# EAGLE board CT_schematic (EAGLE 7.6.0)

Size 100 x 80 mm. Coordinates in mm from the lower left corner, seen from the top.
Outline: 0,0 100,0 100,80 0,80 0,0
Copper layers (1*16): Top 0.035mm / dielectric 1.5mm / Bottom 0.035mm
Design rules "default": minimum track width 10mil, minimum drill 24mil, track to track 8mil, track to pad 8mil, pad to pad 8mil, via to via 8mil, smd to smd 8mil, copper to edge 40mil, drill to drill 8mil, minimum pad ring 10mil, minimum via ring 8mil, stop-mask expansion 4mil, vias tented up to drill 0mil, thermal gap 10mil

## Footprints (pad centres in the part's own frame; a part is rotated, then mirrored left to right if it is on the bottom)
C0603 = smd 0.8 x 0.8: 1 -0.762,0; 2 0.762,0
C0402 = smd 0.5 x 0.5: 1 -0.508,0; 2 0.508,0
C1210 = smd 1.2 x 2.5: 1 -1.524,0; 2 1.524,0
C0805 = smd 1.2 x 1.3: 1 -1.016,0; 2 1.016,0
EXV-9B = smd 2.718 x 1.778: 1 -2.108,0; 2 2.108,0
EXV-9H = smd 3.505 x 1.676: 1 -2.857,0; 2 2.857,0
PJ-037B_PACKAGE = drill 3.7 square: 1 12,0 | drill 3.2 square: 2 6,0
R0603 = smd 0.8 x 0.8: 1 -0.762,0; 2 0.762,0
UFQFPN48 = smd 0.559 x 0.305: 1 -3.375,2.751; 2 -3.375,2.251; 3 -3.375,1.75; 4 -3.375,1.25; 5 -3.375,0.75; 6 -3.375,0.25; 7 -3.375,-0.25; 8 -3.375,-0.75; 9 -3.375,-1.25; 10 -3.375,-1.75; 11 -3.375,-2.251; 12 -3.375,-2.751; 25 3.375,-2.751; 26 3.375,-2.251; 27 3.375,-1.75; 28 3.375,-1.25; 29 3.375,-0.75; 30 3.375,-0.25; 31 3.375,0.25; 32 3.375,0.75; 33 3.375,1.25; 34 3.375,1.75; 35 3.375,2.251; 36 3.375,2.751 | smd 0.305 x 0.559: 13 -2.751,-3.375; 14 -2.251,-3.375; 15 -1.75,-3.375; 16 -1.25,-3.375; 17 -0.75,-3.375; 18 -0.25,-3.375; 19 0.25,-3.375; 20 0.75,-3.375; 21 1.25,-3.375; 22 1.75,-3.375; 23 2.251,-3.375; 24 2.751,-3.375; 37 2.751,3.375; 38 2.251,3.375; 39 1.75,3.375; 40 1.25,3.375; 41 0.75,3.375; 42 0.25,3.375; 43 -0.25,3.375; 44 -0.75,3.375; 45 -1.25,3.375; 46 -1.75,3.375; 47 -2.251,3.375; 48 -2.751,3.375 | smd 5.588 x 5.588: 49 0,0
TSSOP20-I = smd 0.4 x 1.35: 1 -2.925,-2.875; 2 -2.275,-2.875; 3 -1.625,-2.875; 4 -0.975,-2.875; 5 -0.325,-2.875; 6 0.325,-2.875; 7 0.975,-2.875; 8 1.625,-2.875; 9 2.275,-2.875; 10 2.925,-2.875; 11 2.925,2.875; 12 2.275,2.875; 13 1.625,2.875; 14 0.975,2.875; 15 0.325,2.875; 16 -0.325,2.875; 17 -0.975,2.875; 18 -1.625,2.875; 19 -2.275,2.875; 20 -2.925,2.875
HTSS-105-01-G-D = drill 1 pad 1.8 square: 1 0,0 | drill 1 pad 1.8: 2 0,2.54; 3 2.54,0; 4 2.54,2.54; 5 5.08,0; 6 5.08,2.54; 7 7.62,0; 8 7.62,2.54; 9 10.16,0; 10 10.16,2.54
QFN65P400X400X100-17N = smd 1.016 x 0.356: 1 -1.803,0.965; 2 -1.803,0.33; 3 -1.803,-0.33; 4 -1.803,-0.965; 9 1.803,-0.965; 10 1.803,-0.33; 11 1.803,0.33; 12 1.803,0.965 | smd 0.356 x 1.016: 5 -0.965,-1.803; 6 -0.33,-1.803; 7 0.33,-1.803; 8 0.965,-1.803; 13 0.965,1.803; 14 0.33,1.803; 15 -0.33,1.803; 16 -0.965,1.803 | smd 2.108 x 2.108: 17 0,0
QFN-28 = smd 0.813 x 0.305: 1 -2.451,1.5; 2 -2.451,1; 3 -2.451,0.5; 4 -2.451,0; 5 -2.451,-0.5; 6 -2.451,-1; 7 -2.451,-1.5; 15 2.451,-1.5; 16 2.451,-1; 17 2.451,-0.5; 18 2.451,0; 19 2.451,0.5; 20 2.451,1; 21 2.451,1.5 | smd 0.305 x 0.813: 8 -1.5,-2.451; 9 -1,-2.451; 10 -0.5,-2.451; 11 0,-2.451; 12 0.5,-2.451; 13 1,-2.451; 14 1.5,-2.451; 22 1.5,2.451; 23 1,2.451; 24 0.5,2.451; 25 0,2.451; 26 -0.5,2.451; 27 -1,2.451; 28 -1.5,2.451 | smd 3.607 x 3.607: 29 0,0
SJ-43515TS-SMT-TR = smd 2.2 x 3: 1 0.6,-7.4; 4 3.4,-7.4 | smd 3 x 3: 2 12.8,-7.4; 5 17,-3 | smd 2 x 3: 3 5.3,0; 6 2.5,0 | drill 1.8: P$7 4.5,-3.69; P$8 11.54,-3.69
ABS07-32.768KHZ-7-T = smd 1.1 x 2.4: 1 -2.5,0; 2 0,0
ASFL1 = smd 1.7 x 1.5: 1 -1.27,-1.1; 2 1.27,-1.1; 3 1.27,1.1; 4 -1.27,1.1
LP2954 = smd 1.6 x 0.6: 1 -2.475,1.905 | smd 1.55 x 0.6: 2 -2.475,0.635; 3 -2.475,-0.635; 4 -2.475,-1.905; 5 2.475,-1.905; 6 2.475,-0.635; 7 2.475,0.635; 8 2.475,1.905
SON-6 = smd 0.55 x 0.3: 1 -0.355,0.5 | smd 0.52 x 0.3: 2 -0.37,0; 3 -0.37,-0.5; 4 0.37,-0.5; 5 0.37,0; 6 0.37,0.5
SW_4-1437565-2 = smd 1.4 x 2.1: 1 -2.23,4.55; 2 -2.23,-4.55; 3 2.23,4.55; 4 2.23,-4.55
LGM67K-G1J2-24-Z = smd 0.8 x 1.4: A -2,0; C 0,0
NC7SZ125M5X = smd 1.3 x 0.7: 1 -1.3,0.95; 2 -1.3,0; 3 -1.3,-0.95; 4 1.3,-0.95; 5 1.3,0.95
DUMMY_PACKAGE_160 = drill 0.3: 1 0,-1; 2 1.5,-1; 3 3,-1

## Placement (x,y rotation side)
C1  1e-06  [C0603]  -22.86,72.39 0 top  (outside the outline)
C2  1e-07  [C0603]  -26.67,72.39 0 top  (outside the outline)
C3  1e-07  [C0603]  -30.48,72.39 0 top  (outside the outline)
C4  1e-07  [C0603]  -34.29,72.39 0 top  (outside the outline)
C5  1e-07  [C0603]  -38.1,72.39 0 top  (outside the outline)
C6  1e-07  [C0603]  -41.91,72.39 0 top  (outside the outline)
C7  4.7e-06  [C0603]  -19.05,72.39 0 top  (outside the outline)
C8  1e-08  [C0603]  -45.72,72.39 0 top  (outside the outline)
C9  1e-06  [C0603]  -49.53,72.39 0 top  (outside the outline)
C10  1e-11  [C0402]  -76.2,72.39 0 top  (outside the outline)
C11  1e-11  [C0402]  -15.24,77.47 0 top  (outside the outline)
C12  1e-07  [C0402]  -19.05,77.47 0 top  (outside the outline)
C13  1e-07  [C0402]  -22.86,77.47 0 top  (outside the outline)
C14  1e-07  [C0402]  -26.67,77.47 0 top  (outside the outline)
C15  1e-07  [C0402]  -30.48,77.47 0 top  (outside the outline)
C16  1e-07  [C0402]  -34.29,77.47 0 top  (outside the outline)
C17  1e-07  [C0402]  -38.1,77.47 0 top  (outside the outline)
C18  1e-07  [C0402]  -41.91,77.47 0 top  (outside the outline)
C19  1e-06  [C0603]  -53.34,72.39 0 top  (outside the outline)
C20  2.2e-05  [C1210]  -16.51,62.23 0 top  (outside the outline)
C21  2.2e-05  [C1210]  -22.86,62.23 0 top  (outside the outline)
C22  1e-09  [C0402]  -45.72,77.47 0 top  (outside the outline)
C23  1e-09  [C0402]  -49.53,77.47 0 top  (outside the outline)
C24  1e-07  [C0402]  -53.34,77.47 0 top  (outside the outline)
C25  1e-07  [C0402]  -57.15,77.47 0 top  (outside the outline)
C26  1e-07  [C0402]  -60.96,77.47 0 top  (outside the outline)
C27  1e-07  [C0402]  -64.77,77.47 0 top  (outside the outline)
C28  1e-07  [C0402]  -68.58,77.47 0 top  (outside the outline)
C29  1e-05  [C0805]  -53.34,60.96 0 top  (outside the outline)
C30  1e-05  [C0805]  -58.42,60.96 0 top  (outside the outline)
C31  1e-05  [C0805]  -63.5,60.96 0 top  (outside the outline)
C32  1e-05  [C0805]  -68.58,60.96 0 top  (outside the outline)
C33  1e-05  [C0805]  -73.66,60.96 0 top  (outside the outline)
C34  1e-08  [C0402]  -72.39,77.47 0 top  (outside the outline)
C35  1e-08  [C0402]  -76.2,77.47 0 top  (outside the outline)
C36  1e-06  [EXV-9B]  -30.48,60.96 0 top  (outside the outline)
C37  2.2e-06  [EXV-9B]  -39.37,60.96 0 top  (outside the outline)
C38  1e-07  [C0402]  -15.24,82.55 0 top  (outside the outline)
C39  0.0001  [EXV-9H]  -17.78,54.61 0 top  (outside the outline)
C40  0.0001  [EXV-9H]  -29.21,54.61 0 top  (outside the outline)
C41  1e-08  [C0402]  -19.05,82.55 0 top  (outside the outline)
J1  PJ-037B  [PJ-037B_PACKAGE]  -55.88,22.86 0 top  (outside the outline)
R1  10000.0  [R0603]  -40.64,67.31 0 top  (outside the outline)
R2  1000.0  [R0603]  -57.15,72.39 0 top  (outside the outline)
R3  1600.5  [R0603]  -60.96,72.39 0 top  (outside the outline)
R4  4700.0  [R0603]  -64.77,72.39 0 top  (outside the outline)
R5  10000.0  [R0603]  -45.72,67.31 0 top  (outside the outline)
R6  10000.0  [R0603]  -50.8,67.31 0 top  (outside the outline)
R7  10000.0  [R0603]  -55.88,67.31 0 top  (outside the outline)
R8  47000.0  [R0603]  -60.96,67.31 0 top  (outside the outline)
R9  47000.0  [R0603]  -66.04,67.31 0 top  (outside the outline)
R10  47000.0  [R0603]  -71.12,67.31 0 top  (outside the outline)
R11  680.0  [R0603]  -68.58,72.39 0 top  (outside the outline)
R12  100000.0  [R0603]  -15.24,67.31 0 top  (outside the outline)
R13  100000.0  [R0603]  -20.32,67.31 0 top  (outside the outline)
R14  164658.62  [R0603]  -78.74,60.96 0 top  (outside the outline)
R15  100000.0  [R0603]  -25.4,67.31 0 top  (outside the outline)
R16  10000.0  [R0603]  -76.2,67.31 0 top  (outside the outline)
R17  10000.0  [R0603]  -15.24,72.39 0 top  (outside the outline)
R18  9100.0  [R0603]  -72.39,72.39 0 top  (outside the outline)
R19  680000.0  [R0603]  -30.48,67.31 0 top  (outside the outline)
R20  120000.0  [R0603]  -35.56,67.31 0 top  (outside the outline)
U1  STM32L431CBU6  [UFQFPN48]  -34.29,45.72 0 top  (outside the outline)
U2  SP3203ECY-L/TR  [TSSOP20-I]  -24.13,35.56 0 top  (outside the outline)
U3  HTSS-105-01-G-D  [HTSS-105-01-G-D]  -43.18,34.29 0 top  (outside the outline)
U4  TSC2008TRGVRQ1  [QFN65P400X400X100-17N]  -35.56,7.62 0 top  (outside the outline)
U5  HTSS-105-01-G-D  [HTSS-105-01-G-D]  -62.23,34.29 0 top  (outside the outline)
U6  WM8731CLSEFL  [QFN-28]  -72.39,54.61 0 top  (outside the outline)
U7  SJ-43515TS-SMT-TR  [SJ-43515TS-SMT-TR]  -66.04,10.16 0 top  (outside the outline)
U8  SJ-43515TS-SMT-TR  [SJ-43515TS-SMT-TR]  -39.37,25.4 0 top  (outside the outline)
U9  ABS07-32.768KHZ-7-T  [ABS07-32.768KHZ-7-T]  -50.8,54.61 0 top  (outside the outline)
U10  ASFL1-12.288MHZ-EC-T  [ASFL1]  -57.15,45.72 0 top  (outside the outline)
U11  ASFL1-25MHZ-NCS  [ASFL1]  -73.66,45.72 0 top  (outside the outline)
U12  LP2954AIMX/NOPB  [LP2954]  -25.4,45.72 0 top  (outside the outline)
U13  TPS3895ADRYR  [SON-6]  -27.94,81.28 0 top  (outside the outline)
U14  4-1437565-2  [SW_4-1437565-2]  -72.39,21.59 0 top  (outside the outline)
U15  Q65110A2395  [LGM67K-G1J2-24-Z]  -59.69,53.34 0 top  (outside the outline)
U16  nc7sz125m5x  [NC7SZ125M5X]  -46.99,60.96 0 top  (outside the outline)
U17  Dummy  [DUMMY_PACKAGE_160]  -25.4,82.55 0 top  (outside the outline)

## Library data of the parts
C1-C41 J1 R1-R20 U1-U17 = circuit_tree

## Nets
CLK_CRYSTAL_U1_3: C10.1 U1.3 U9.1
CLK_CRYSTAL_U1_4: C11.1 U1.4 U9.2
CLK_U1_5: U1.5 U11.3
CLK_U6_1: U6.1 U10.3
GND: C1.2 C2.2 C3.2 C4.2 C5.2 C6.2 C7.2 C8.2 C9.2 C10.2 C11.2 C12.2 C13.2 C16.2 C17.2 C18.2 C19.2 C23.2 C24.2 C25.2 C26.2 C27.2 C28.2 C29.2 C30.2 C31.2 C32.2 C33.2 C34.2 C35.2 C36.2 C37.2 C38.2 C39.2 C40.2 C41.2 J1.2 R2.2 R5.2 R8.2 R9.2 R10.2 R15.2 R18.2 R20.2 U1.8 U1.23 U1.35 U1.47 U1.49 U2.18 U3.9 U4.10 U4.12 U4.17 U5.9 U6.4 U6.15 U6.19 U6.25 U6.26 U6.29 U7.1 U8.1 U10.2 U11.2 U12.4 U13.2 U15.C U16.1 U16.3 U17.1
NET_U1_7: R4.1 U1.7 U16.4
NET_U1_44: R5.1 U1.44
NET_U1_45: R3.1 U1.45 U15.A
NET_U1_46: R1.1 U1.46 U14.3 U14.4
NET_U2_1: C14.1 U2.1
NET_U2_2: C16.1 U2.2
NET_U2_3: C14.2 U2.3
NET_U2_4: C15.1 U2.4
NET_U2_5: C15.2 U2.5
NET_U2_6: C17.1 U2.6
NET_U2_20: U2.20
NET_U3_3: U2.14 U3.3
NET_U3_4: U2.13 U3.4
NET_U3_5: U2.17 U3.5
NET_U3_6: U2.16 U3.6
NET_U4_15: R7.1 U4.15
NET_U5_3: U4.7 U5.3
NET_U5_4: U4.9 U5.4
NET_U5_5: U4.6 U5.5
NET_U5_6: U4.8 U5.6
NET_U6_9: U6.9
NET_U6_20: C28.1 C33.1 U6.20
NET_U7_2: C21.1 R9.1 U7.2
NET_U7_5: C20.1 R8.1 U7.5
NET_U7_13: C20.2
NET_U7_14: C21.2
NET_U8_5: C22.1 C23.1 R10.1 R11.1 U8.5
NET_U8_21: R11.2
NET_U8_22: C22.2
NET_U12_3: R13.1 U12.3
NET_U12_5: R12.1 U12.5
NET_U12_7: R14.2 R15.1 U12.7
NET_U13_1: R17.1 R18.1 U13.1
NET_U13_3: R19.2 R20.1 U13.3
NET_U13_4: R16.1 U13.4 U16.2
NET_U14_1: R2.1 U14.1 U14.2
PROC_LPUART1_CTS: U1.16 U2.8
PROC_LPUART1_RTS: U1.19 U2.10
PROC_LPUART1_RX: U1.13 U2.11
PROC_LPUART1_TX: U1.12 U2.7
PROC_SAI1_FS_A: U1.25 U6.9 U6.11
PROC_SAI1_SCK_A: U1.21 U6.7
PROC_SAI1_SD_A: U1.28 U6.8
PROC_SPI1_MISO: U1.32 U4.16
PROC_SPI1_MOSI: U1.17 U4.2
PROC_SPI1_NSS: R6.1 U1.14 U4.3
PROC_SPI1_SCK: U1.11 U4.4
PROC_TIM1_CH2: U1.30 U17.2
PROC_TIM1_CH2N: U1.18 U17.3
VCC_S1_6V3: C36.1 C39.1 C40.1 J1.1 R13.2 U12.8
VCC_TIER1_3V3: C1.1 C2.1 C3.1 C4.1 C5.1 C6.1 C7.1 C8.1 C9.1 C12.1 C13.1 C18.1 C19.1 C24.1 C25.1 C26.1 C27.1 C29.1 C30.1 C31.1 C32.1 C34.1 C35.1 C37.1 C38.1 C41.1 R1.2 R3.2 R4.2 R6.2 R7.2 R12.2 R14.1 R16.2 R17.2 R19.1 U1.1 U1.9 U1.24 U1.36 U1.48 U2.12 U2.19 U4.5 U6.3 U6.5 U6.12 U6.18 U10.4 U11.4 U12.1 U13.6 U16.5

## Tracks (layer width: path | path; a pad name or v marks a point on that pad's centre or on a via)
CLK_CRYSTAL_U1_3  (2 unrouted)
CLK_CRYSTAL_U1_4  (2 unrouted)
CLK_U1_5  (1 unrouted)
CLK_U6_1  (1 unrouted)
GND  (71 unrouted)
NET_U1_7  (2 unrouted)
NET_U1_44  (1 unrouted)
NET_U1_45  (2 unrouted)
NET_U1_46  (3 unrouted)
NET_U2_1  (1 unrouted)
NET_U2_2  (1 unrouted)
NET_U2_3  (1 unrouted)
NET_U2_4  (1 unrouted)
NET_U2_5  (1 unrouted)
NET_U2_6  (1 unrouted)
NET_U3_3  (1 unrouted)
NET_U3_4  (1 unrouted)
NET_U3_5  (1 unrouted)
NET_U3_6  (1 unrouted)
NET_U4_15  (1 unrouted)
NET_U5_3  (1 unrouted)
NET_U5_4  (1 unrouted)
NET_U5_5  (1 unrouted)
NET_U5_6  (1 unrouted)
NET_U6_20  (2 unrouted)
NET_U7_2  (2 unrouted)
NET_U7_5  (2 unrouted)
NET_U8_5  (4 unrouted)
NET_U12_3  (1 unrouted)
NET_U12_5  (1 unrouted)
NET_U12_7  (2 unrouted)
NET_U13_1  (2 unrouted)
NET_U13_3  (2 unrouted)
NET_U13_4  (2 unrouted)
NET_U14_1  (2 unrouted)
PROC_LPUART1_CTS  (1 unrouted)
PROC_LPUART1_RTS  (1 unrouted)
PROC_LPUART1_RX  (1 unrouted)
PROC_LPUART1_TX  (1 unrouted)
PROC_SAI1_FS_A  (2 unrouted)
PROC_SAI1_SCK_A  (1 unrouted)
PROC_SAI1_SD_A  (1 unrouted)
PROC_SPI1_MISO  (1 unrouted)
PROC_SPI1_MOSI  (1 unrouted)
PROC_SPI1_NSS  (2 unrouted)
PROC_SPI1_SCK  (1 unrouted)
PROC_TIM1_CH2  (1 unrouted)
PROC_TIM1_CH2N  (1 unrouted)
VCC_S1_6V3  (5 unrouted)
VCC_TIER1_3V3  (52 unrouted)